# EAGLE board A T BS Sensor (EAGLE 8.4.0)
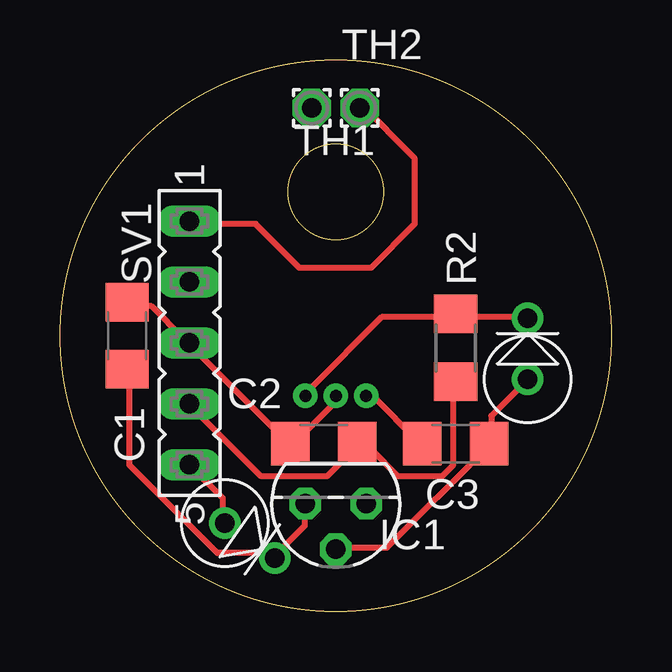
[diagram p0: board, top side]
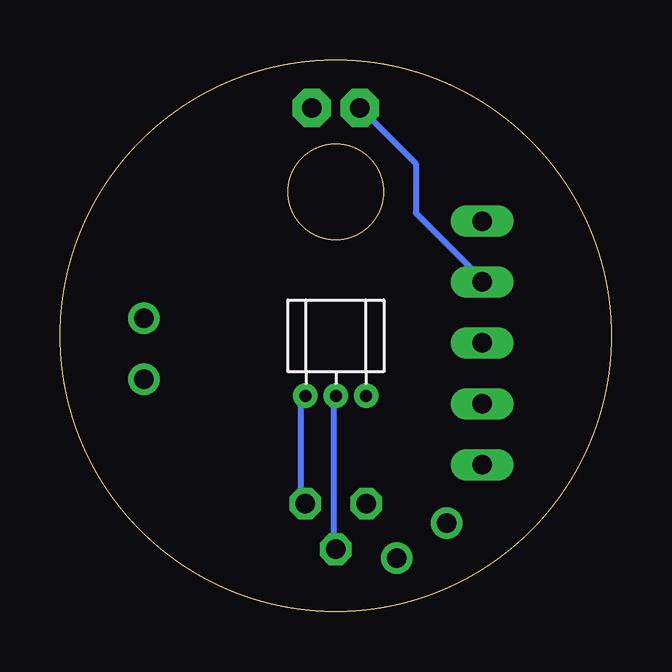
[diagram p1: board, bottom side, seen from below]

Size 23 x 23 mm. Coordinates in mm from the lower left corner, seen from the top.
Outline: circle at 11.5,11.5 radius 11.5
Outline: circle at 11.5,17.5 radius 2
Copper layers (1*16): Top 0.035mm / dielectric 1.5mm / Bottom 0.035mm
Design rules "default": minimum track width 10mil, minimum drill 24mil, track to track 8mil, track to pad 8mil, pad to pad 8mil, via to via 8mil, smd to smd 8mil, copper to edge 40mil, drill to drill 8mil, minimum pad ring 10mil, minimum via ring 8mil, stop-mask expansion 4mil, vias tented up to drill 0mil, thermal gap 10mil

## Footprints (pad centres in the part's own frame; a part is rotated, then mirrored left to right if it is on the bottom)
C1206 = smd 1.6 x 1.8: 1 -1.4,0; 2 1.4,0
DO41-V = drill 0.8: P$1 -3.81,0; P$2 -1.27,0
TO92 = drill 0.813 octagon: 1 -1.27,0; 2 0,1.905; 3 1.27,0
R1206 = smd 1.6 x 1.803: 1 -1.422,0; 2 1.422,0
FE05-1 = drill 0.813 long: 1 -5.08,0; 2 -2.54,0; 3 0,0; 4 2.54,0; 5 5.08,0
1,6/0,8 = drill 0.813 pad 1.6 octagon: 1 0,0
UA-3-SIP-HOR = drill 0.5: P$1 -1.27,0; P$2 0,0; P$3 1.27,0

## Placement (x,y rotation side)
C1  100n  [C1206]  2.8,11.5 90 top
C2  1n  [C1206]  11,7 180 top
C3  100n  [C1206]  16.5,7 0 top
D1  1N4004-V  [DO41-V]  19.5,13.5 90 top
D2  1N4004-V  [DO41-V]  10,1.5 325 top
IC1  LP2950ACZ3.0  [TO92]  11.5,4.5 180 top
R2  47R PTC  [R1206]  16.5,11 90 top
SV1  [FE05-1]  5.4,11.2 270 top
TH1  [1,6/0,8]  10.5,21 0 top
TH2  [1,6/0,8]  12.5,21 0 top
U$1  SS411A  [UA-3-SIP-HOR]  11.5,9 180 bottom

## Library data of the parts
C1-C3 = rcl
D1 D2 = diode
IC1 = linear
R2 = resistor
SV1 = con-lsta
TH1 TH2 = wirepad
U$1 = tinley-custom

## Nets
GND: C1.2 C2.2 C3.2 D1.P$1 IC1.2 SV1.3 U$1.P$2
N$1: C1.1 D2.P$2 IC1.3
N$2: SV1.2 TH1.1
N$3: C3.1 IC1.1 U$1.P$3
N$4: D1.P$2 R2.2 U$1.P$1
N$5: D2.P$1 SV1.5
N$6: SV1.1 TH2.1
N$7: C2.1 R2.1 SV1.4

## Tracks (layer width: path | path; a pad name or v marks a point on that pad's centre or on a via)
GND
  Top 0.254: C1.2 2.9,12.73 3.82,12.73 5.19,11.36 SV1.3 5.41,11.13 9.53,7.02 C2.2 9.76,7.02 11.59,8.84 U$1.P$2 | D1.P$1 19.36,9.53 17.99,8.16 17.99,7.02 C3.2 17.76,6.79 13.64,2.67 11.59,2.67 IC1.2
  Bottom 0.254: IC1.2 11.59,2.67 11.59,8.84 U$1.P$2
N$1
  Top 0.254: C1.1 2.9,9.99 2.9,6.1 6.56,2.44 8.84,2.44 D2.P$2 9.07,2.44 10.22,3.59 10.22,4.27 IC1.3
N$2
  Bottom 0.254: SV1.2 5.41,13.87 8.16,16.62 8.16,18.67 10.45,20.96 TH1.1
N$3
  Top 0.254: C3.1 15.02,7.02 12.96,9.07 U$1.P$3
  Bottom 0.254: IC1.1 12.96,4.5 12.96,8.84 U$1.P$3
N$4
  Top 0.254: D1.P$2 19.36,12.27 16.62,12.27 R2.2 16.39,12.27 13.42,12.27 10.45,9.3 10.45,9.07 U$1.P$1
N$5
  Top 0.254: D2.P$1 6.79,3.82 6.79,4.73 5.41,6.1 SV1.5
N$6
  Top 0.254: SV1.1 5.41,16.16 8.16,16.16 9.99,14.33 12.96,14.33 14.79,16.16 14.79,18.9 12.5,21.19 TH2.1
N$7
  Top 0.254: R2.1 16.39,9.53 16.39,6.1 15.93,5.64 14.1,5.64 12.96,6.79 12.5,6.79 C2.1 12.27,6.79 11.13,5.64 8.39,5.64 5.41,8.62 SV1.4